# EAGLE board button (EAGLE 6.2)
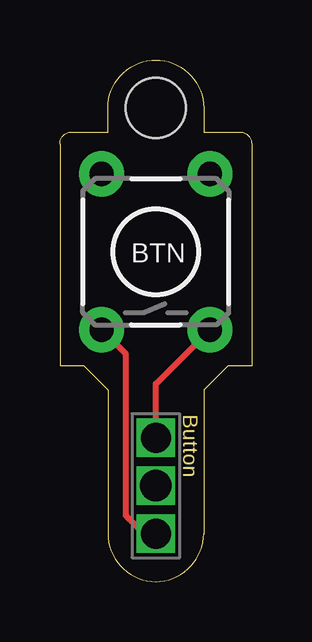
[diagram p0: board, top side]
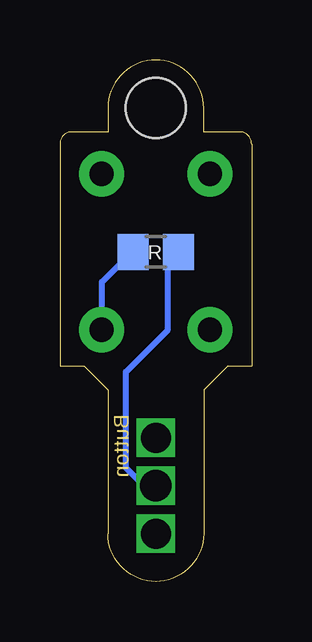
[diagram p1: board, bottom side, seen from below]

Size 8 x 21.75 mm. Coordinates in mm from the lower left corner, seen from the top.
Outline: 4,0 arc90 6,2 6,8 7,9 8,9 8,18.25 arc90 7.5,18.75 6,18.75 6,19.75 arc90 4,21.75 arc90 2,19.75 2,18.75 0.5,18.75 arc90 0,18.25 0,9 1,9 2,8 2,2 arc90 4,0
Copper layers (1*16): Top 0.035mm / dielectric 1.5mm / Bottom 0.035mm
Design rules: minimum track width 10mil, minimum drill 24mil, track to track 8mil, track to pad 8mil, pad to pad 8mil, via to via 8mil, smd to smd 8mil, copper to edge 40mil, drill to drill 8mil, minimum pad ring 5mil, minimum via ring 8mil, stop-mask expansion 4mil, vias tented up to drill 0mil, thermal gap 10mil
Holes 2.5 mm at 4,19.75

## Footprints (pad centres in the part's own frame; a part is rotated, then mirrored left to right if it is on the bottom)
TACTILE-PTH = drill 1.016 pad 1.88: 1 -3.251,2.261; 2 3.251,2.261; 3 -3.251,-2.261; 4 3.251,-2.261
SENSOR_HEADER = drill 1.25 pad 1.6 square: 1 0,2; 3 0,-2 | drill 1.3 pad 1.6 square: 2 0,0
R0805 = smd 1.3 x 1.5: 1 -0.95,0; 2 0.95,0

## Placement (x,y rotation side)
BTN  [TACTILE-PTH]  4,13.75 90 top
E$2  [SENSOR_HEADER]  4,4 0 top
R  [R0805]  4,13.75 0 bottom

## Library data of the parts
BTN = SparkFun
E$2 = appessory
R = rcl

## Nets
S$1: E$2.3
S$3: E$2.2
S$4: E$2.1

## Tracks (layer width: path | path; a pad name or v marks a point on that pad's centre or on a via)
S$1
  Top 0.254: E$2.3 3.5,2 2.75,2.75 2.75,9.5 1.75,10.5
S$2
  Bottom 0.254: 6.25,10.5 6.25,12.5 5,13.75
S$3
  Bottom 0.254: E$2.2 4.5,4 5.25,4.75 5.25,8.75 3.5,10.5 3.5,13.5
S$4
  Top 0.254: E$2.1 4,8.25 6.25,10.5

## Text on the board
Dimension: Button